# EAGLE board display (EAGLE 9.5.2)
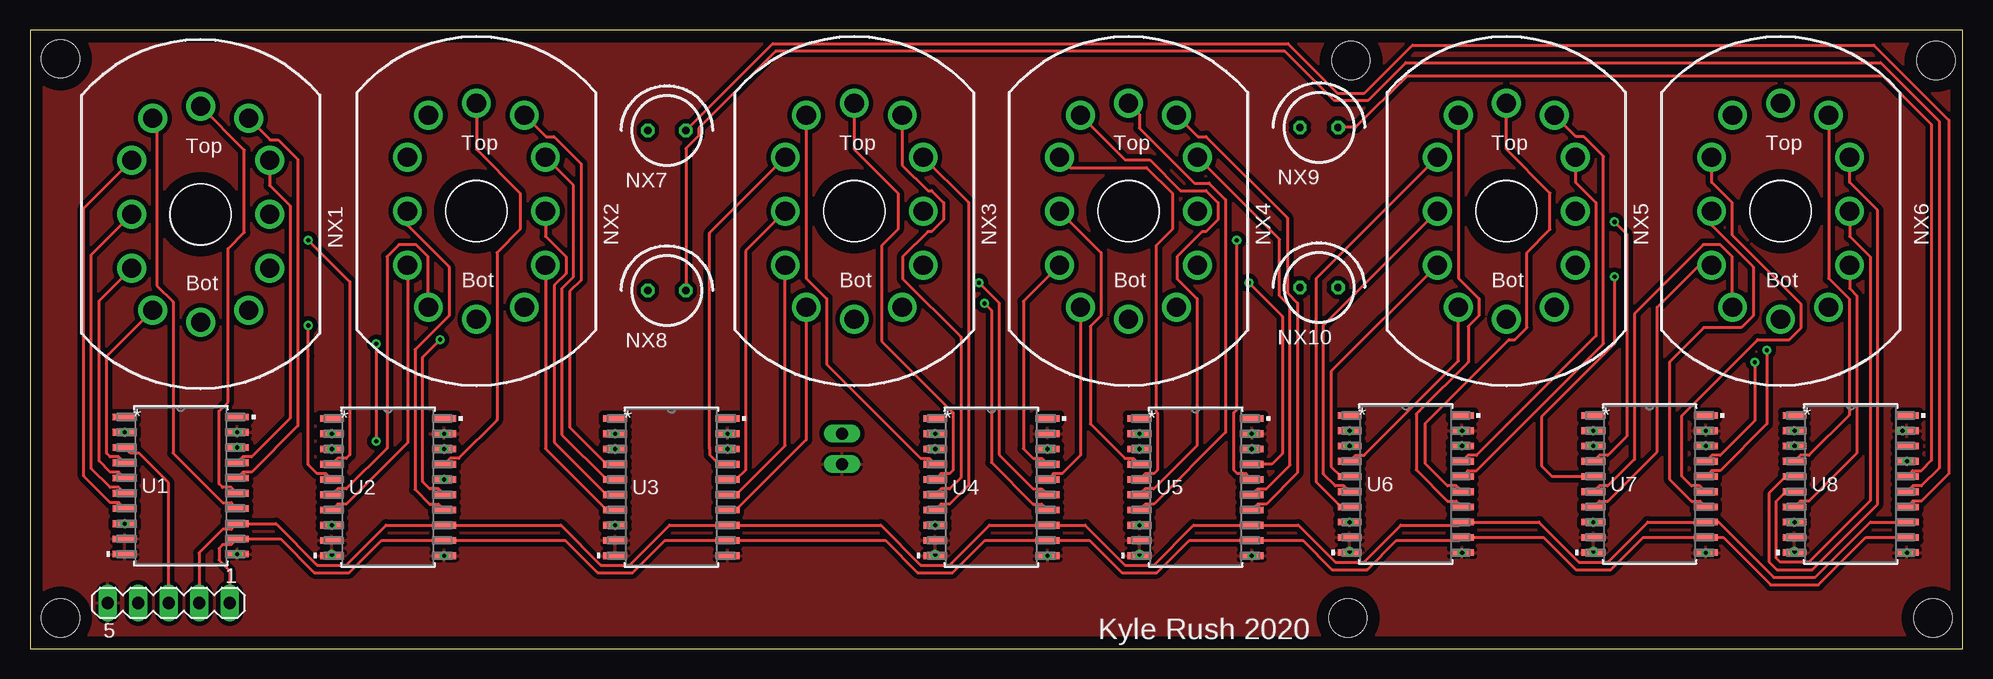
[diagram p0: board, top side]
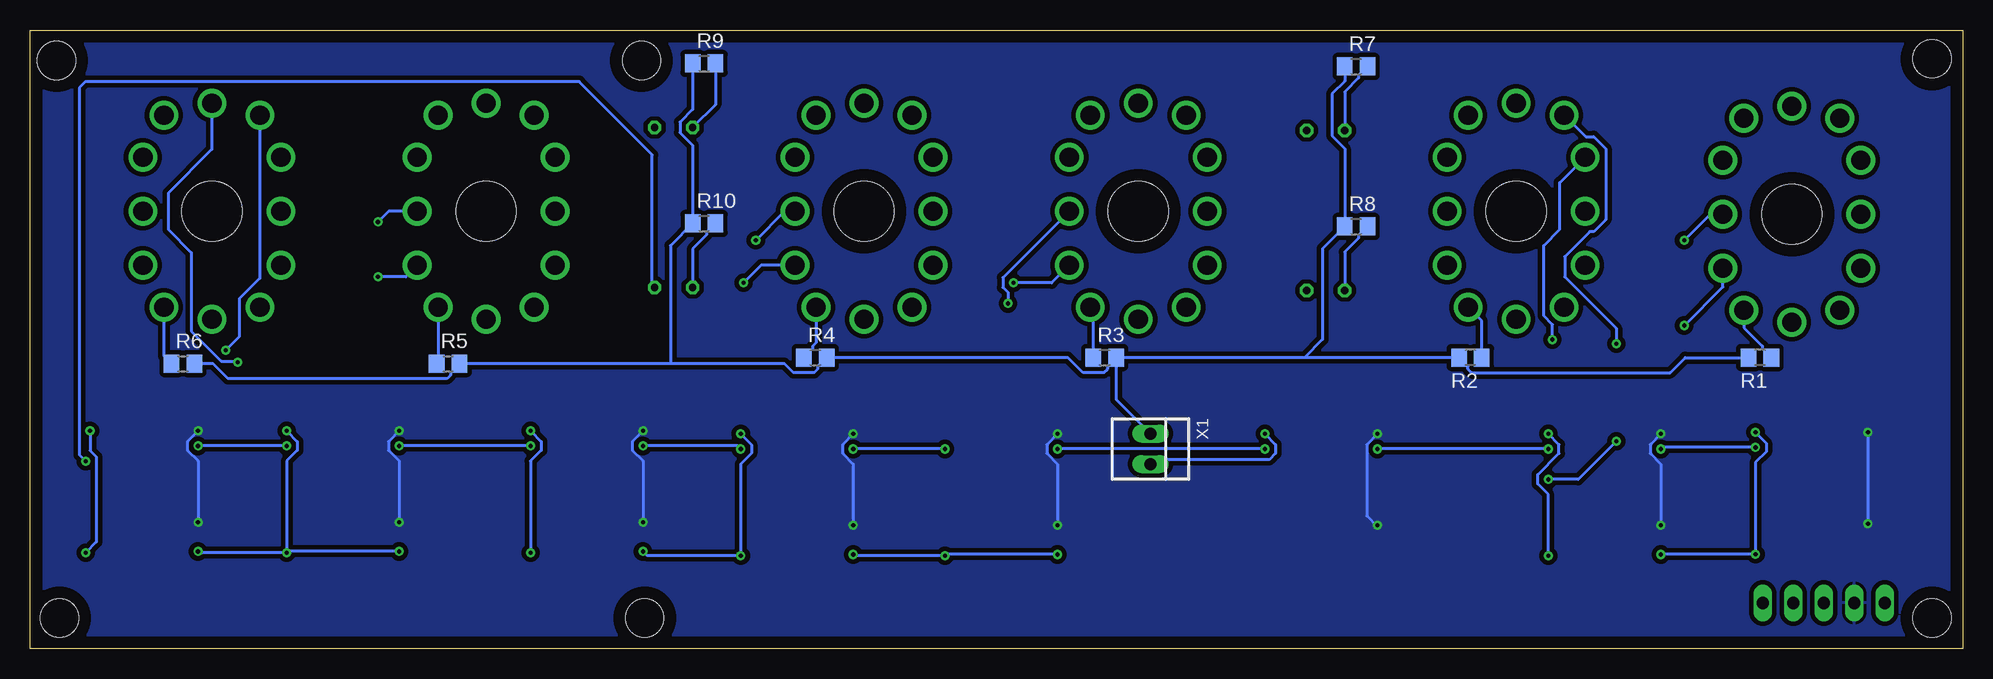
[diagram p1: board, bottom side, seen from below]

Size 161.09 x 51.55 mm. Coordinates in mm from the lower left corner, seen from the top.
Outline: 0,0 161.09,0 161.09,51.55 0,51.55 0,0
Copper layers (1*16): Top 0.035mm / dielectric 1.5mm / Bottom 0.035mm
Design rules "default": minimum track width 6mil, minimum drill 0.35mm, track to track 6mil, track to pad 6mil, pad to pad 6mil, via to via 6mil, smd to smd 6mil, copper to edge 40mil, drill to drill 6mil, minimum pad ring 10mil, minimum via ring 8mil, stop-mask expansion 4mil, vias tented up to drill 0mil, thermal gap 10mil
Net classes: 0 default: width 0.254 mm, clearance 0.381 mm
Holes 3.17 mm at 2.54,49.15 2.54,2.54 110.11,49.02 109.86,2.54 158.88,49.02 158.62,2.54

## Footprints (pad centres in the part's own frame; a part is rotated, then mirrored left to right if it is on the bottom)
IN-12-DSUB = drill 1.6: 0 5.75,-4.5; 1 -4,-8; 2 -5.75,-4.5; 3 -5.75,0; 4 -5.75,4.5; 5 -4,8; 6 0,9; 7 4,8; 8 5.75,4.5; 9 5.75,0; A 4,-8; LHDP 0,-9 | hole 5: 0,0
IN-3 = drill 0.6 octagon: A -1.587,0; K 1.587,0
R0805 = smd 1.3 x 1.5: 1 -0.95,0; 2 0.95,0
MA05-1 = drill 1.016 long: 1 -5.08,0; 2 -2.54,0; 3 0,0; 4 2.54,0; 5 5.08,0
DW20 = smd 1.981 x 0.559: 1 -4.686,5.715; 2 -4.686,4.445; 3 -4.686,3.175; 4 -4.686,1.905; 5 -4.686,0.635; 6 -4.686,-0.635; 7 -4.686,-1.905; 8 -4.686,-3.175; 9 -4.686,-4.445; 10 -4.686,-5.715; 11 4.686,-5.715; 12 4.686,-4.445; 13 4.686,-3.175; 14 4.686,-1.905; 15 4.686,-0.635; 16 4.686,0.635; 17 4.686,1.905; 18 4.686,3.175; 19 4.686,4.445; 20 4.686,5.715
22-23-2021 = drill 1 long: 1 -1.27,0; 2 1.27,0

## Placement (x,y rotation side)
NX1  [IN-12-DSUB]  14.22,36.2 0 top
NX2  [IN-12-DSUB]  37.21,36.45 0 top
NX3  [IN-12-DSUB]  68.71,36.45 0 top
NX4  [IN-12-DSUB]  91.57,36.45 0 top
NX5  [IN-12-DSUB]  123.06,36.45 0 top
NX6  [IN-12-DSUB]  145.92,36.45 0 top
NX7  IN-3  [IN-3]  53.09,43.18 0 top
NX8  IN-3  [IN-3]  53.09,29.84 0 top
NX9  IN-3  [IN-3]  107.44,43.43 0 top
NX10  IN-3  [IN-3]  107.44,30.1 0 top
R1  15k  [R0805]  16.89,24.26 180 bottom
R2  15k  [R0805]  41.02,24.26 180 bottom
R3  15k  [R0805]  71.5,24.26 0 bottom
R4  15k  [R0805]  95.63,24.26 0 bottom
R5  15k  [R0805]  126.24,23.75 0 bottom
R6  15k  [R0805]  148.34,23.75 0 bottom
R7  68k  [R0805]  50.55,48.51 0 bottom
R8  68k  [R0805]  50.55,35.18 0 bottom
R9  68k  [R0805]  104.9,48.77 0 bottom
R10  68k  [R0805]  104.9,35.43 0 bottom
SV1  [MA05-1]  11.56,3.81 180 top
U1  TPIC6B595DWRG4  [DW20]  12.57,13.59 0 top
U2  TPIC6B595DWRG4  [DW20]  29.84,13.46 0 top
U3  TPIC6B595DWRG4  [DW20]  53.47,13.46 0 top
U4  TPIC6B595DWRG4  [DW20]  80.14,13.46 0 top
U5  TPIC6B595DWRG4  [DW20]  97.16,13.46 0 top
U6  TPIC6B595DWRG4  [DW20]  114.68,13.72 0 top
U7  TPIC6B595DWRG4  [DW20]  135,13.72 0 top
U8  TPIC6B595DWRG4  [DW20]  151.76,13.72 0 top
X1  22-23-2021  [22-23-2021]  67.69,16.64 270 bottom

## Library data of the parts
NX1-NX10 = nixies-us
R1-R10 = rcl; SPICEPREFIX: R
SV1 = con-lstb; OC_FARNELL: unknown; OC_NEWARK: unknown
U1-U8 = Digikey; BUILT_BY: EMA_UL_Team; MANUFACTURER: Texas Instruments; MANUFACTURER_PART_NUMBER: TPIC6B595DWRG4; VENDOR: Texas Instruments
X1 = con-molex; MF: MOLEX; MPN: 22-23-2021; OC_FARNELL: 1462926; OC_NEWARK: 25C3832

## Nets
GND: SV1.5 U1.9 U1.10 U1.11 U1.19 U2.9 U2.10 U2.11 U2.19 U3.9 U3.10 U3.11 U3.19 U4.9 U4.10 U4.11 U4.19 U5.9 U5.10 U5.11 U5.19 U6.9 U6.10 U6.11 U6.19 U7.9 U7.10 U7.11 U7.19 U8.9 U8.10 U8.11 U8.19 X1.2
N$1: NX1.1 U1.4
N$2: NX1.2 U1.5
N$3: NX1.3 U1.6
N$4: NX1.4 U1.7
N$5: NX1.5 U1.14
N$6: NX1.6 U1.15
N$7: NX1.7 U1.16
N$8: NX1.8 U1.17
N$9: NX1.9 U2.4
N$10: NX1.0 U2.5
N$11: NX2.1 U2.6
N$12: NX2.2 U2.7
N$13: NX2.3 U2.14
N$14: NX2.4 U2.15
N$15: NX2.5 U2.16
N$16: NX2.6 U2.17
N$17: NX2.7 U3.4
N$18: NX2.8 U3.5
N$19: NX2.9 U3.6
N$20: NX2.0 U3.7
N$22: NX7.A R7.2
N$23: NX1.A R1.1
N$24: NX2.A R2.1
N$25: NX3.A R3.1
N$26: NX4.A R4.1
N$27: U4.18 U5.3
N$28: SV1.1 U1.12 U2.12 U3.12 U4.12 U5.12 U6.12 U7.12 U8.12
N$29: NX3.1 U3.14
N$30: NX3.2 U3.15
N$31: NX3.3 U3.16
N$32: NX3.4 U3.17
N$33: NX3.8 U4.7
N$34: NX3.6 U4.5
N$35: NX3.9 U4.14
N$36: NX3.5 U4.4
N$37: NX3.7 U4.6
N$38: NX3.0 U4.15
N$39: NX4.1 U4.16
N$40: NX4.2 U4.17
N$41: NX4.0 U5.17
N$42: NX4.9 U5.16
N$43: NX4.8 U5.15
N$44: NX4.7 U5.14
N$45: NX4.6 U5.7
N$46: NX4.5 U5.6
N$47: NX4.4 U5.5
N$48: NX4.3 U5.4
N$49: SV1.2 U1.13 U2.13 U3.13 U4.13 U5.13 U6.13 U7.13 U8.13
N$50: U5.18 U6.3
N$51: NX5.A R5.1
N$52: SV1.3 U1.3
N$53: NX6.A R6.1
N$56: NX5.0 U7.5
N$57: NX5.7 U6.16
N$58: NX5.6 U6.15
N$59: NX5.5 U6.14
N$60: NX5.4 U6.7
N$61: NX5.3 U6.6
N$62: NX5.2 U6.5
N$63: NX5.1 U6.4
N$64: U6.18 U7.3
N$67: NX5.8 U6.17
N$68: NX5.9 U7.4
N$69: U7.18 U8.3
N$72: NX6.1 U7.6
N$73: NX6.2 U7.7
N$74: NX6.3 U7.14
N$75: NX6.4 U7.15
N$76: NX6.5 U7.16
N$77: U1.18 U2.3
N$78: U2.18 U3.3
N$79: U3.18 U4.3
N$80: NX6.6 U7.17
N$81: NX6.7 U8.4
N$82: NX6.8 U8.5
N$83: NX6.9 U8.6
N$84: NX6.0 U8.7
N$85: NX8.A R8.2
N$86: NX9.A R9.2
N$87: NX10.A R10.2
N$88: NX7.K U8.14
N$89: NX8.K U8.15
N$90: NX9.K U8.16
N$91: NX10.K U8.17
V+: R1.2 R2.2 R3.2 R4.2 R5.2 R6.2 R7.1 R8.1 R9.1 R10.1 X1.1
VCC: SV1.4 U1.2 U1.8 U2.2 U2.8 U3.2 U3.8 U4.2 U4.8 U5.2 U5.8 U6.2 U6.8 U7.2 U7.8 U8.2 U8.8

## Tracks (layer width: path | path; a pad name or v marks a point on that pad's centre or on a via)
GND  (via drill 0.35)
  Top 0.254: v25.16,7.85 U2.10 | U4.10 v75.45,7.85 | v92.47,7.85 U5.10 | v110,8.1 U6.10 | U8.19 v156.09,18.16 | U7.10 v130.31,8.1 | v147.08,8.1 U8.10
  Bottom 0.254: U1.19 17.26,18.02 16.37,17.13 16.37,16.4 17.26,15.51 U1.11 25.13,7.87 v25.16,7.85 | X1.2 67.31,15.75 57.79,15.75 57.27,16.27 57.27,17 58.15,17.89 U3.19 | U2.11 34.53,12.84 35.42,13.73 35.42,14.5 33.65,16.27 33.65,17 34.53,17.89 U2.19 | v75.45,7.85 84.72,7.85 U4.11 92.37,7.75 v92.47,7.85 | v110,8.1 109.64,7.75 U5.11 101.84,15.38 100.95,16.27 100.95,17 101.84,17.89 U5.19 | U6.19 119.37,18.14 118.48,17.26 118.48,16.52 119.37,15.64 U6.11 | U7.19 139.69,18.14 138.8,17.26 138.8,16.52 139.69,15.64 U7.11 | v156.09,18.16 156.09,16.51 155.56,15.99 155.56,8.89 U8.11 | v130.31,8.1 139.59,8.1 U7.11 | U7.11 146.98,8 v147.08,8.1
  other vias: 17.26,18.03 17.26,7.87 58.15,17.91 34.53,7.75 34.53,17.91 84.82,7.75 101.84,7.75 119.37,18.16 119.37,8 139.69,18.16 139.69,8 156.45,8 101.84,17.91
  pour Top: 0,51.44 0,0 161.16,0 161.16,51.44
N$1
  Top 0.254: U1.4 7.4,15.98 6.69,15.98 6.39,16.27 6.39,24.36 NX1.1
N$2
  Top 0.254: U1.5 7.4,14.71 6.69,14.71 5.75,15.64 5.75,28.97 NX1.2
N$3
  Top 0.254: U1.6 7.4,13.44 6.69,13.44 5.12,15 5.12,32.84 NX1.3
N$4
  Top 0.254: U1.7 7.4,12.17 6.69,12.17 4.48,14.37 4.48,36.7 NX1.4
N$5
  Top 0.254: NX1.5 10.58,43.84 10.58,30.25 11.93,28.9 11.93,16.29 16.06,12.17 16.78,12.17 U1.14
N$6
  Top 0.254: U1.15 16.78,13.44 16.06,13.44 15.76,13.73 15.76,19.79 16.52,20.55 16.52,33.34 17.87,34.69 17.87,41.55 NX1.6
N$7
  Top 0.254: U1.16 17.74,14.71 18.46,14.71 22.32,18.56 22.32,40.77 20.68,42.4 20.02,42.4 NX1.7
N$8
  Top 0.254: U1.17 17.74,15.98 18.46,15.98 21.68,19.2 21.68,36.9 19.97,38.61 NX1.8
N$9  (via drill 0.35)
  Top 0.254: U2.4 25.64,15.85 26.36,15.85 26.66,16.15 26.66,30.58 v23.2,34.04
  Bottom 0.254: NX1.9 21.04,36.2 v23.2,34.04
N$10  (via drill 0.35)
  Top 0.254: U2.5 24.68,14.58 23.96,14.58 23.2,15.33 23.2,24.38 v23.2,26.92
  Bottom 0.254: v23.2,26.92 19.97,30.15 NX1.0
N$11
  Top 0.254: U2.6 25.64,13.31 26.36,13.31 29.75,16.7 29.75,32.66 30.75,33.66 32.17,33.66 33.17,32.66 33.17,28.49 NX2.1
N$12
  Top 0.254: U2.7 25.64,12.04 26.36,12.04 31.46,17.14 NX2.2
N$13
  Top 0.254: NX2.3 31.46,35.26 34.92,31.8 34.92,27.74 32.1,24.92 32.1,13.27 33.33,12.04 34.05,12.04 U2.14
N$14  (via drill 0.35)
  Top 0.254: U2.15 34.05,13.31 33.33,13.31 32.73,13.91 32.73,24.3 v34.19,25.76
  Bottom 0.254: v34.19,25.76 34.19,27.01 34.92,27.74 34.92,33.59 33.57,34.94 33.57,38.84 NX2.4
N$15  (via drill 0.35)
  Top 0.254: v28.87,25.4 v28.87,17.27
  Bottom 0.254: NX2.5 31.42,42.66 30.75,42.66 29.75,41.66 29.75,35.74 30.75,34.74 31.08,34.74 33.17,32.66 33.17,30.99 28.87,26.69 v28.87,25.4 | v28.87,17.27 32.04,14.1 U2.16
  other vias: 34.53,14.1
N$16
  Top 0.254: U2.17 35.01,15.85 35.73,15.85 38.92,19.04 38.92,33.01 40.85,34.94 40.85,37.96 37.21,41.6 NX2.6
N$17
  Top 0.254: NX2.7 43,42.66 43.67,42.66 45.94,40.39 45.94,30.71 44.99,29.77 44.99,18.44 48.06,15.37 48.2,15.37 U3.4
N$18
  Top 0.254: NX2.8 45.3,38.61 45.3,30.98 44.32,30 44.32,17.84 48.06,14.1 U3.5
N$19
  Top 0.254: NX2.9 42.96,34.36 44.67,32.66 44.67,31.24 43.69,30.26 43.69,17.2 48.06,12.83 U3.6
N$20
  Top 0.254: U3.7 48.06,11.56 42.96,16.66 NX2.0
N$22
  Bottom 0.254: R7.2 50.34,47.77 50.34,47.55 51.5,46.39 NX7.A
N$23
  Bottom 0.254: R1.1 16.68,25 16.68,25.22 18.22,26.76 NX1.A
N$24
  Bottom 0.254: R2.1 40.07,27.31 NX2.A
N$25
  Bottom 0.254: R3.1 72.45,28.19 NX3.A
N$26
  Bottom 0.254: NX4.A 95.57,25.49 95.84,25.22 95.84,25 R4.1
N$27  (via drill 0.35)
  Bottom 0.254: U4.18 U5.3
  other vias: 84.82,16.64 92.47,16.64
N$28
  Top 0.254: U8.12 153.03,9.27 149.07,5.31 145.09,5.31 141.13,9.27 U7.12 134.47,9.27 131.78,6.58 128.85,6.58 126.16,9.27 U6.12 119.11,9.02 113.9,9.02 111.46,6.58 108.53,6.58 106.09,9.02 U5.12 96.62,9.02 93.93,6.33 91,6.33 88.31,9.02 U4.12 79.61,9.02 76.92,6.33 73.99,6.33 71.29,9.02 U3.12 52.94,9.02 50.24,6.33 47.32,6.33 44.62,9.02 U2.12 29.32,9.02 26.62,6.33 23.7,6.33 20.88,9.14 U1.12 16.78,8.66 16.06,8.66 15.76,8.36 15.76,7.38 16.64,6.51 SV1.1
N$29
  Top 0.254: U3.14 58.87,11.56 64.71,17.39 NX3.1
N$30
  Top 0.254: U3.15 58.87,12.83 62.96,16.91 NX3.2
N$31
  Top 0.254: NX3.3 59.65,33.14 59.65,14.88 58.87,14.1 U3.16
N$32
  Top 0.254: NX3.4 56.66,34.65 56.66,16.76 56.66,16.66 56.66,16.15 57.44,15.37 U3.17
N$33
  Top 0.254: U4.7 75.93,12.04 76.65,12.04 78.22,13.61 78.22,37.19 NX3.8
N$34
  Top 0.254: NX3.6 68.71,41.6 72.35,37.96 72.35,34.94 71,33.59 71,25.62 76.95,19.67 76.95,14.88 76.65,14.58 75.93,14.58 U4.5
N$35  (via drill 0.35)
  Top 0.254: v79.57,28.77 80.14,28.2 80.14,15.53 83.62,12.04 84.34,12.04 U4.14
  Bottom 0.254: v79.57,28.77 79.57,29.69 79.99,30.11 79.99,30.91 NX3.9
N$36
  Top 0.254: U4.4 74.97,15.85 74.25,15.85 66.42,23.68 66.42,29.16 64.71,30.86 NX3.5
N$37
  Top 0.254: U4.6 75.93,13.31 76.65,13.31 77.58,14.24 77.58,25.99 72.75,30.82 72.75,32.66 74.83,34.74 75.16,34.74 76.17,35.74 76.17,37.16 75.16,38.16 74.83,38.16 72.71,40.28 NX3.7
N$38  (via drill 0.35)
  Top 0.254: v79.11,30.48 80.77,28.81 80.77,16.16 83.62,13.31 84.34,13.31 U4.15
  Bottom 0.254: NX3.0 75.93,30.48 v79.11,30.48
N$39
  Top 0.254: U4.16 85.31,14.58 86.02,14.58 87.57,16.12 NX4.1
N$40
  Top 0.254: NX4.2 82.8,28.94 82.8,16.67 83.62,15.85 84.34,15.85 U4.17
N$41  (via drill 0.35)
  Top 0.254: v101.6,30.48 104.39,27.69 104.39,16.26 103.5,15.37 U5.17
  Bottom 0.254: NX4.0 100.13,31.95 v101.6,30.48
N$42  (via drill 0.35)
  Top 0.254: U5.16 101.36,14.58 100.64,14.58 100.34,14.88 100.34,19.67 100.58,19.91 v100.58,34.04
  Bottom 0.254: v100.58,34.04 98.17,36.45 NX4.9
N$43
  Top 0.254: U5.15 102.32,13.31 103.04,13.31 105.03,15.3 105.03,28.52 104.16,29.4 104.16,34.11 NX4.8
N$44
  Top 0.254: NX4.7 97.36,42.66 98.02,42.66 104.79,35.89 104.79,29.66 105.66,28.79 105.66,14.66 103.04,12.04 102.32,12.04 U5.14
N$45
  Top 0.254: NX4.6 92.47,44.55 92.47,43.38 97.06,38.79 98.29,38.79 99.66,37.42 99.66,18.03 93.67,12.04 92.95,12.04 U5.7
N$46
  Top 0.254: NX4.5 91.29,40.73 93.34,40.73 95.91,38.16 98.02,38.16 99.03,37.16 99.03,35.74 98.02,34.74 97.69,34.74 95.61,32.66 95.61,30.82 97.28,29.16 97.28,16.91 93.67,13.31 92.95,13.31 U5.6
N$47
  Top 0.254: NX4.4 86.67,40.09 93.08,40.09 95.21,37.96 95.21,34.94 93.86,33.59 93.86,19.77 93.97,19.67 93.97,14.88 93.67,14.58 92.95,14.58 U5.5
N$48
  Top 0.254: NX4.3 89.28,32.99 89.28,27.74 88.39,26.86 88.39,18.73 91.27,15.85 91.99,15.85 U5.4
N$49
  Top 0.254: U8.13 153.4,10.54 148.81,5.94 145.35,5.94 140.75,10.54 U7.13 134.84,10.54 131.52,7.21 129.11,7.21 125.79,10.54 U6.13 119.11,10.29 114.27,10.29 111.2,7.21 108.79,7.21 105.72,10.29 U5.13 97,10.29 93.67,6.96 91.27,6.96 87.94,10.29 U4.13 79.98,10.29 76.65,6.96 74.25,6.96 70.92,10.29 U3.13 53.31,10.29 49.98,6.96 47.58,6.96 44.25,10.29 U2.13 29.69,10.29 26.36,6.96 23.96,6.96 20.5,10.41 U1.13 16.78,9.93 16.06,9.93 14.1,7.97 SV1.2
N$50  (via drill 0.35)
  Bottom 0.254: U5.18 102.09,16.89 U6.3
  other vias: 101.84,16.64 109.99,16.89
N$51
  Bottom 0.254: NX5.A 127.06,23.87 R5.1
N$52
  Top 0.254: U1.3 8.37,16.28 9.09,16.28 11.56,13.81 SV1.3
N$53
  Bottom 0.254: NX6.A 149.92,24.39 R6.1
N$56  (via drill 0.35)
  Top 0.254: v132.08,30.99 132.08,25.4 125.98,19.3 125.98,15.24 126.87,14.35 U7.5
  Bottom 0.254: NX5.0 129.77,30.99 v132.08,30.99
N$57
  Top 0.254: U6.16 119.85,14.83 120.57,14.83 131.16,25.42 131.16,41.02 129.52,42.66 128.85,42.66 NX5.7
N$58
  Top 0.254: U6.15 118.89,13.56 118.17,13.56 116.33,15.4 116.33,18.8 123.28,25.74 123.77,25.74 124.77,26.74 124.77,33.01 126.71,34.94 126.71,37.96 123.06,41.6 NX5.6
N$59
  Top 0.254: NX5.5 119.06,30.86 120.77,29.16 120.77,27.74 119.89,26.86 119.89,23.88 115.82,19.81 115.8,19.81 115.56,19.57 115.56,14.9 118.17,12.29 118.89,12.29 U6.14
N$60
  Top 0.254: NX5.4 107.19,30.82 107.19,13.9 109.28,11.81 U6.7
N$61
  Top 0.254: U6.6 109.51,13.56 108.79,13.56 107.82,14.53 107.82,26.96 NX5.3
N$62
  Top 0.254: NX5.2 108.46,23.09 108.46,15.17 109.28,14.35 U6.5
N$63
  Top 0.254: U6.4 110.48,16.1 111.2,16.1 119.06,23.97 NX5.1
N$64  (via drill 0.35)
  Bottom 0.254: U6.18 U7.3
  other vias: 119.37,16.89 130.31,16.89
N$67
  Top 0.254: U6.17 119.85,16.1 120.57,16.1 130.52,26.06 130.52,37.16 128.81,38.86 NX5.8
N$68  (via drill 0.35)
  Top 0.254: v132.08,35.56 133.1,34.54 133.1,17.68 131.52,16.1 130.8,16.1 U7.4
  Bottom 0.254: NX5.9 131.19,36.45 v132.08,35.56
N$69  (via drill 0.35)
  Bottom 0.254: U7.18 U8.3
  other vias: 139.69,16.89 147.08,16.89
N$72
  Top 0.254: U7.6 130.8,13.56 131.52,13.56 133.73,15.78 133.73,27.92 139.47,33.66 140.88,33.66 141.88,32.66 141.88,28.49 NX6.1
N$73
  Top 0.254: U7.7 130.8,12.29 131.52,12.29 135.64,16.41 135.64,28.45 139.14,31.95 NX6.2
N$74
  Top 0.254: NX6.3 140.17,35.26 143.63,31.8 143.63,27.74 142.63,26.74 139.52,26.74 136.65,23.88 136.65,14.13 138.49,12.29 139.21,12.29 U7.14
N$75
  Top 0.254: U7.15 139.21,13.56 138.49,13.56 137.67,14.38 137.67,19.4 144.01,25.74 146.63,25.74 147.63,26.74 147.63,28.7 141.88,34.45 141.88,37.16 140.17,38.86 NX6.4
N$76  (via drill 0.35)
  Top 0.254: U7.16 140.17,14.83 140.89,14.83 144.78,18.73 v144.78,24.86
  Bottom 0.254: NX6.5 141.92,30.86 143.63,29.16 143.63,26 v144.78,24.86
N$77  (via drill 0.35)
  Bottom 0.254: U1.18 25.03,16.76 U2.3
  other vias: 17.26,16.76 25.16,16.64
N$78  (via drill 0.35)
  Bottom 0.254: U2.18 U3.3
  other vias: 34.53,16.64 48.78,16.64
N$79  (via drill 0.35)
  Bottom 0.254: U3.18 U4.3
  other vias: 58.15,16.64 75.45,16.64
N$80  (via drill 0.35)
  Top 0.254: U7.17 140.17,16.1 140.89,16.1 143.76,18.98 v143.76,23.88
  Bottom 0.254: NX6.6 145.92,41.6 149.57,37.96 149.57,34.94 147.63,33.01 147.63,26.45 145.15,23.97 143.86,23.97 v143.76,23.88
N$81
  Top 0.254: U8.4 147.56,16.1 148.28,16.1 151.63,19.45 151.63,29.16 149.92,30.86 NX6.7
N$82
  Top 0.254: NX6.8 151.67,38.86 154.02,36.52 154.02,12.05 148.54,6.58 145.62,6.58 144.94,7.25 144.94,12.94 146.36,14.35 U8.5
N$83
  Top 0.254: NX6.9 151.67,34.36 153.38,32.66 153.38,12.31 148.28,7.21 145.88,7.21 145.58,7.51 145.58,12.3 146.36,13.08 U8.6
N$84
  Top 0.254: NX6.0 151.67,30.01 152.27,29.42 152.27,16.28 148.28,12.29 147.56,12.29 U8.7
N$85
  Bottom 0.254: R8.2 50.34,34.44 50.34,34.22 51.5,33.06 NX8.A
N$86
  Bottom 0.254: R9.2 103.95,45.34 NX9.A
N$87
  Bottom 0.254: R10.2 104.69,34.69 104.69,34.47 105.86,33.31 NX10.A
N$88
  Top 0.254: NX7.K 61.9,50.41 104.86,50.41 108.98,46.29 111.24,46.29 115.24,50.29 153.69,50.29 159.94,44.04 159.94,14.59 157.65,12.29 156.93,12.29 U8.14
N$89
  Top 0.254: NX8.K 54.67,41.68 55.74,42.74 55.74,43.34 62.17,49.77 104.6,49.77 108.72,45.66 111.5,45.66 114.67,48.83 154.25,48.83 159.13,43.95 159.13,15.04 157.65,13.56 156.93,13.56 U8.15
N$90
  Top 0.254: U8.16 156.93,14.83 157.65,14.83 158.5,15.68 158.5,43.69 154.43,47.75 114.81,47.75 110.49,43.43 NX9.K
N$91  (via drill 0.35)
  Bottom 0.254: NX10.K 109.22,30.29 109.22,41.15 115.32,47.24 156.46,47.24 156.97,46.74 156.97,16.14 U8.17
  other vias: 156.45,15.62
V+
  Bottom 0.254: R1.2 23.12,24.26 24.38,23 40.93,23 41.23,23.3 41.23,23.52 R2.2 54.86,24.26 | 54.86,24.26 R3.2 | 54.86,24.26 53.34,25.78 53.34,33.34 R8.1 51.5,41.68 52.56,42.74 52.56,46.23 51.5,47.29 R7.1 | R3.2 70.55,20.77 X1.1 | R3.2 71.29,23.52 71.29,23.3 71.59,23 73.31,23 74.57,24.26 R4.2 95.42,23.52 95.42,23.3 95.72,23 97.44,23 98.19,23.75 107.7,23.75 | 107.7,23.75 R5.2 126.03,23.01 126.03,22.79 126.33,22.49 144.57,22.49 145.83,23.75 R6.2 | 107.7,23.75 107.7,33.59 R10.1 105.85,41.93 106.92,42.99 106.92,43.87 105.85,44.94 R9.1
VCC  (via drill 0.35)
  Bottom 0.254: U3.2 48.78,17.89 49.67,17 49.67,11.06 48.77,10.16 48.77,10.27 U3.8 | U2.2 25.16,17.89 26.05,17 26.05,16.27 25.16,15.38 U2.8 | U1.2 U1.8 | U4.2 75.45,17.89 76.34,17 76.34,16.27 75.45,15.38 U4.8 | U5.2 92.47,17.89 93.36,17 93.36,16.27 92.47,15.38 U5.8 | U6.2 110,18.14 110.88,17.26 110.88,16.52 110,15.64 U6.8 | U7.2 130.31,18.14 131.2,17.26 131.2,16.52 130.31,15.64 U7.8 | U8.2 147.08,18.14 147.97,17.26 147.97,16.52 147.08,15.64 U8.8
  other vias: 7.89,10.41 7.89,18.03 48.78,17.91 48.78,10.29 25.16,17.91 25.16,10.29 75.45,17.91 75.45,10.29 92.47,17.91 92.47,10.29 109.99,18.16 109.99,10.54 130.31,18.16 130.31,10.54 147.08,18.16 147.08,10.54
  pour Bottom: 0,51.69 0,0 160.78,0 160.78,51.69

## Text on the board
tPlace: Kyle Rush 2020